# EAGLE board Slim Attenuverting Mixer PANEL v1.1 (EAGLE 7.7.0)
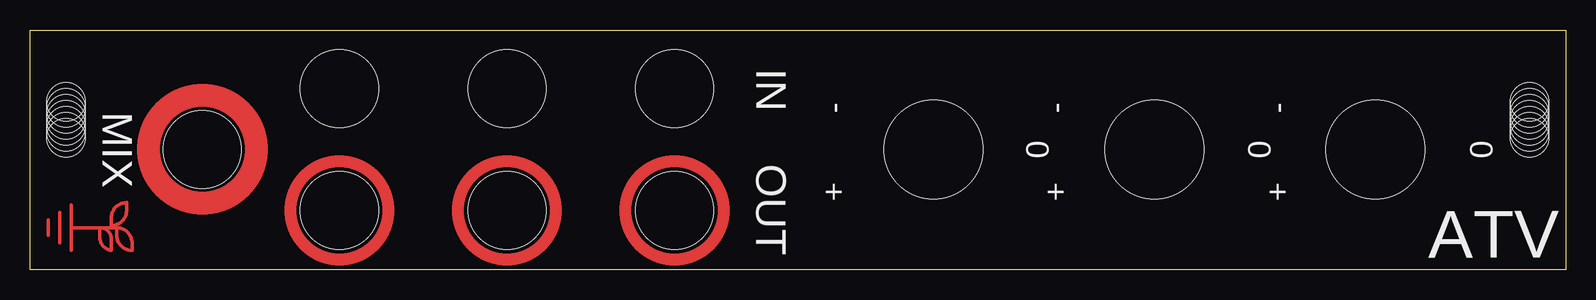
[diagram p0: board, top side]
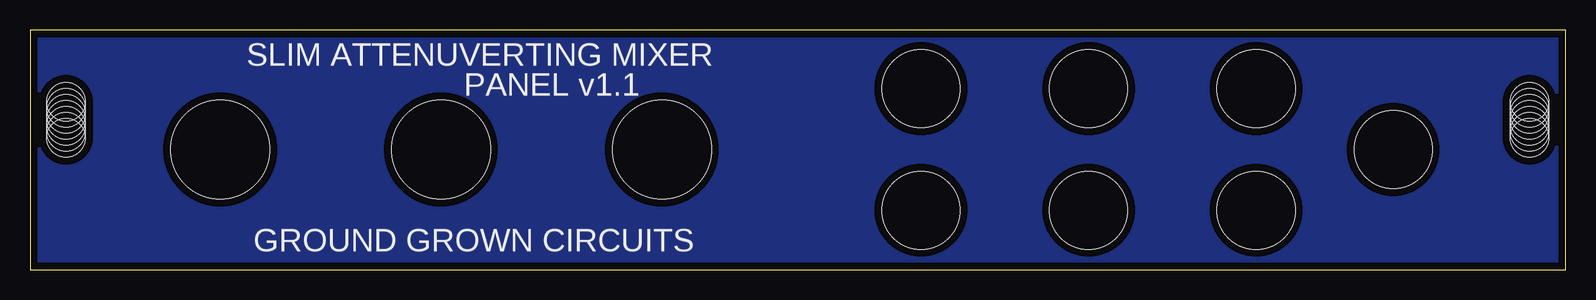
[diagram p1: board, bottom side, seen from below]

Size 128 x 20 mm. Coordinates in mm from the lower left corner, seen from the top.
Outline: 0,0 0,20 128,20 128,0 0,0
Copper layers (1*16): Top 0.035mm / dielectric 1.5mm / Bottom 0.035mm
Design rules "SparkFun": minimum track width 8mil, minimum drill 20mil, track to track 8mil, track to pad 8mil, pad to pad 8mil, via to via 8mil, smd to smd 8mil, copper to edge 8mil, drill to drill 8mil, minimum pad ring 12mil, minimum via ring 10mil, stop-mask expansion 4mil, vias tented up to drill 20mil, thermal gap 10mil

## Footprints (pad centres in the part's own frame; a part is rotated, then mirrored left to right if it is on the bottom)
MOUNT_DRILL = hole 3.2: 3,9; 3,8.5; 3,8; 3,7.5; 3,7; 3,6.5; 3,6
JACK_DRILL_COPPER_EXS = hole 6.5: 0,0
JACK_DRILL = hole 6.5: 0,0
JACK_DRILL_COPPER = hole 6.5: 0,0
POT_DRILL = hole 8.25: 0,0

## Placement (x,y rotation side)
E$1  [MOUNT_DRILL]  128,20 180 top
E$2  [MOUNT_DRILL]  0,20 180 bottom
E$3  [JACK_DRILL_COPPER_EXS]  25.79,4.95 0 top
E$4  [JACK_DRILL]  39.76,15.11 0 top
E$5  [JACK_DRILL]  53.73,15.11 0 top
E$6  [JACK_DRILL_COPPER]  14.36,10.03 0 top
E$7  [JACK_DRILL]  25.79,15.11 0 top
E$8  [JACK_DRILL_COPPER_EXS]  39.76,4.95 0 top
E$9  [JACK_DRILL_COPPER_EXS]  53.73,4.95 0 top
E$10  [POT_DRILL]  112.15,10.03 0 top
E$11  [POT_DRILL]  75.32,10.03 0 top
E$12  [POT_DRILL]  93.73,10.03 0 top
E$13  [LOGO_SMALL_COPPER]  3.5,3.5 270 top

## Library data of the parts
E$1-E$13 = GroundGrownCircuits

## Tracks (layer width: path | path; a pad name or v marks a point on that pad's centre or on a via)
S$1
  pour Bottom (isolate 0.61): 0,0 0,20 128,20 128,0

## Text on the board
tPlace: IN | - | - | - | MIX | 0 | 0 | 0 | + | + | + | OUT | ATV
bPlace: SLIM ATTENUVERTING MIXER | PANEL v1.1 | GROUND GROWN CIRCUITS